# Altium PCB PCB_TEMT6000.PcbDoc
Units mm, origin at the board's own origin, x right, y up, seen from the top; angles counter-clockwise.
Board outline 12.19 x 12.32 mm, 2 copper layers (Top Layer, Bottom Layer); 4 components, 3 nets, 9 pads, 0 vias.
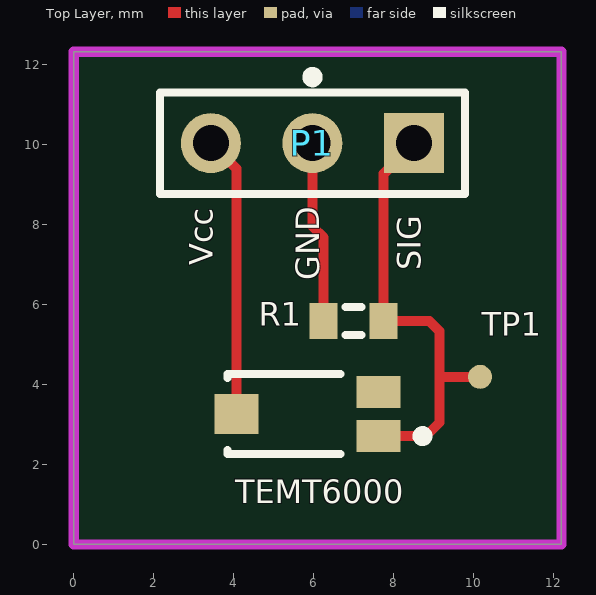
[diagram p0: Top Layer view]
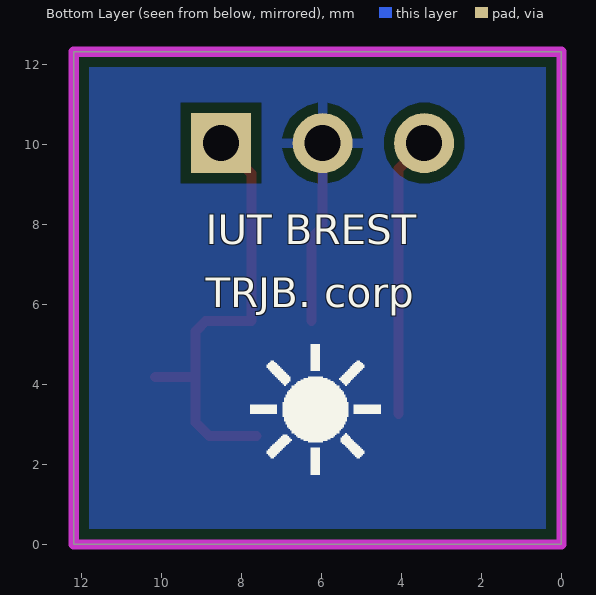
[diagram p1: Bottom Layer view, seen from below]

## Layer stack, top to bottom
Top Solder: solder mask 0.0102, Solder Resist, Dk 3.5
Top Layer: signal copper 0.0356
Dielectric 1: dielectric 0.32, FR-4, Dk 4.8
Bottom Layer: signal copper 0.0356
Bottom Solder: solder mask 0.0102, Solder Resist, Dk 3.5

## Board outline
0,0 12.192,0 12.192,12.319 0,12.319

## Design rules (kind name [scope] priority, off if disabled: settings)
Clearance GND_TOP [InNamedPolygon('GND_Top')] p1: gap=1 ignorepadtopadclearanceinfootprint=FALSE
Clearance GND [InNamedPolygon('NONET_L01_P003')] p2: gap=1 ignorepadtopadclearanceinfootprint=FALSE
Clearance Clearance_2 [InNamedPolygon('NONET_L01_P003')] p3: gap=1 ignorepadtopadclearanceinfootprint=FALSE
Clearance Clearance_1 [InNamedPolygon('NONET_L01_P001')] p4: gap=1 ignorepadtopadclearanceinfootprint=FALSE
Clearance [All] p5: gap=0.254 ignorepadtopadclearanceinfootprint=FALSE except(0: Arc-Hole Track-Hole SMDPad-Hole THPad-Hole Via-Hole Fill-Hole Poly-Hole Region-Hole Text-Hole)
PolygonConnect [All] p1: connectstyle=Relief reliefconductorwidth=0.254 reliefentries=4 polygonreliefangle="90 Angle" airgapwidth=0.254
RoutingVias [All] p1: holewidth=0.711 width=1.27 viastyle="Through Hole" minholewidth=0.711 minwidth=1.27 maxholewidth=0.711 maxwidth=1.27
SolderMaskExpansion [All] p1: expansion=0.102 istentingtop=FALSE
SupplyNets "Schematic Supply Nets" [InNet('GND')] p1: voltage=0.000
Width [All] p1: maxlimit=0.254 minlimit=0.254 preferedwidth=0.254
30 further rules are at their usual default settings.

## Components (designator, comment, footprint, x,y, rotation, side; value= is the part's Value field where it differs from the comment)
P1 "Header 3" HDR1X3 8.509,10.033 r180 top
R1 "Res" J1-0603 6.997,5.588 r0 top value=10k
TEMT6000 "TEMT6000X01" VSIL-TEMT6000X01_V 5.845,3.26 r180 top
TP1 "TPAD6R" TP06R 10.16,4.191 r90 top

## Footprints (in the part's own frame and the unit in brackets; to place one, negate y for a bottom-side part, rotate by r counter-clockwise, add the part's x,y. Pads: shape width x height; smd on the part's side, far side on the other; paste and mask are expansions set on the pad)
HDR1X3 [mm] "Connector; Header; 3 Position"
  rect 1.5x1.5 hole 0.9: 1(0,0)
  round 1.5 hole 0.9: 2(2.54,0) 3(5.08,0)
  silkscreen extent -1.27,-1.27 6.35,1.27
J1-0603 [mm] "Chip Resistor, Body 1.6x0.8mm, IPC High Density"
  rect 0.7x0.9 smd: 1(-0.75,0) 2(0.75,0)
  silkscreen extent -0.2,-0.35 0.2,0.35, body extent -0.85,-0.48 0.85,0.48, height 0.9
TP06R [mm] "Testpoint, round, d=0.6mm"
  round 0.6 smd paste-1: 1(0,0)
VSIL-TEMT6000X01_V [mm] "SMD, 3-Leads, Body 4x2mm"
  rect 1.1x0.8 smd: 1(-1.775,0.55) 2(-1.775,-0.55)
  rect 1.1x1 smd: 3(1.775,0)
  silkscreen extent -3,-1 2,1, body extent -2,-1 2,1, height 1.05

## Part data
P1: "Header, 3-Pin", LatestRevisionDate=17-Jul-2002, LatestRevisionNote="Re-released for DXP Platform.", Publisher="Altium Limited"
R1: library part Res3, "Resistor", LatestRevisionDate=29-May-2009, LatestRevisionNote="IPC-7351 Footprint Added.", PackageDescription="Chip Resistor", PackageReference=J1-0603, Published=8-Jun-2000, Publisher="Altium Limited"
TEMT6000: library part CMP-010-00016-3, "Ambient Light Sensor, 100 mW, -40 to 100 degC, 3-Pin SMD, RoHS, Tape and Reel", Case/Package=1206, Manufacturer="Vishay Siliconix", Package Description="3-Pin Surface Mount Device, Body 4 x 2 mm", Datasheet URL=http://www.vishay.com/docs/81579/temt6000.pdf, Datasheet Version="Rev. 1.9, 08/2011", Mounting Technology=SM, Package Reference=1206, RoHS Compliant=Unknown, Sensor Type=Light
TP1: library part CMP-00028-00002-2, "0.6mm round", Pins=1

## Nets (pads, with @x,y where several pads share a name; then routed paths per layer and width w, separated by ;. In a path a pad name is that pad's centre, name@x,y a point inside that pad or via, vN(x,y) a via of type N, cw(c..) or ccw(c..) an arc to the next point about the centre after c; other vN are vias at no path point)
GND: P1.2 R1.1 | length 4.6
  Top Layer w0.254: P1.2 5.969,7.949 6.247,7.671 R1.1
NetP1_1: P1.1 R1.2 TEMT6000.1 TP1.1 | length 11.2
  Top Layer w0.254: TEMT6000.1 8.806,2.71 9.144,3.048 9.144,4.191 ; P1.1 7.747,9.271 R1.2 8.89,5.588 9.144,5.334 9.144,4.191 ; TP1.1 9.144,4.191
NetP1_3: P1.3 TEMT6000.3 | length 7
  Top Layer w0.254: P1.3 4.07,9.392 TEMT6000.3
pads on no net: TEMT6000.2

## Polygon pours and split planes (outlines as drawn)
GND on Bottom Layer "GND_L02_P000" (solid, pour order 0): 0,0 12.192,0 12.192,12.319 0,12.319

## Keep-outs
Keep-Out Layer:
  the board outline again, w0.254

## Silkscreen, mask and mechanical layers (free items; w line width, h text height)
Top Overlay:
  circle w0.254: c5.969,11.684 r0.127
  text "Vcc" at 3.673,6.986 h1 r90
  text "SIG" at 8.879,6.858 h1 r90
  text "GND" at 6.339,6.604 h1 r90
Bottom Overlay:
  drawing of 9 lines, arcs and shapes, not listed
  text "IUT BREST" at 8.89,7.253 h1.27
  text "TRJB. corp" at 8.89,5.686 h1.27